# Altium PCB main.PcbDoc (part 7 of 8)
Units mil, origin at the board's own origin, x right, y up, seen from the top; angles counter-clockwise.
Board outline 3385.83 x 2362.2 mil, 8 copper layers (L1 (SIG), L2 (GND), L3 (SIG), L4 (GND), L5 (PWR), L6 (SIG), L7 (GND), L8 (SIG)), stack 46.958 mil thick; 318 components, 288 nets, 1482 pads, 1056 vias.
Unrouted connection lines stored in the file: 7.
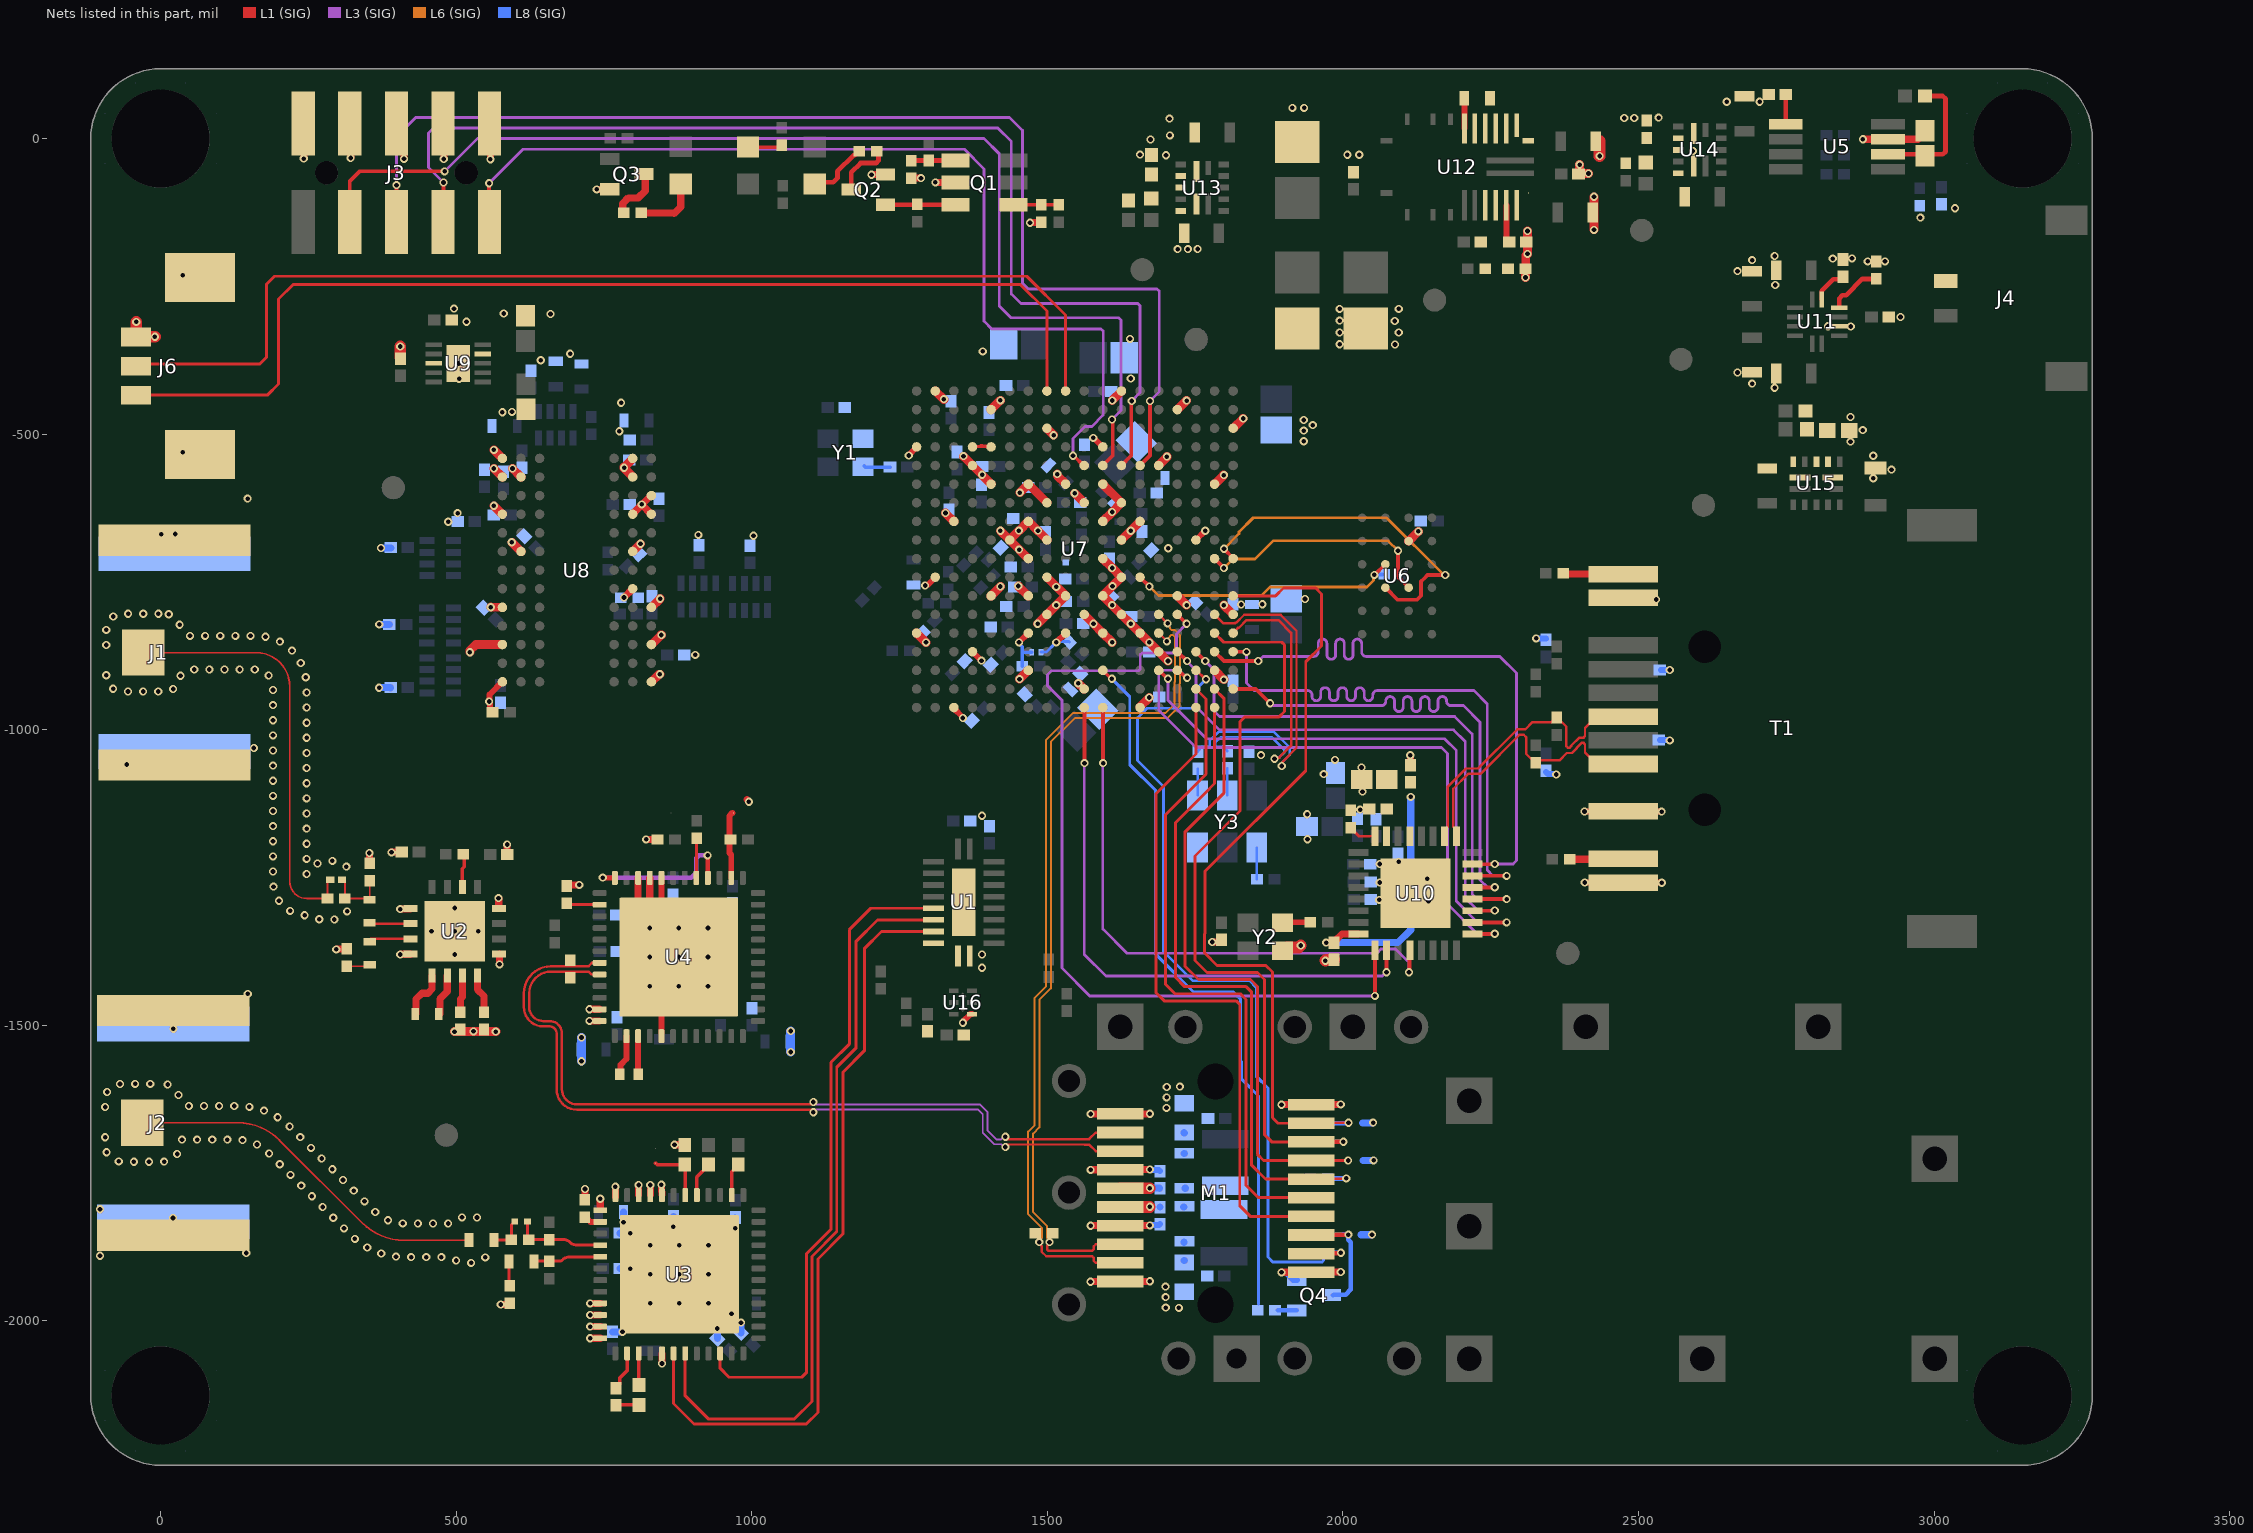
[diagram p11: the nets of this part, all layers, seen from the top]

## Via types
v1: diameter 13.78, hole 7.87, L1 (SIG) to L8 (SIG), tented both sides, 1033 vias
v2: diameter 13.78, hole 7.87, L1 (SIG) to L8 (SIG), 23 vias

## Nets (pads, with @x,y where several pads share a name; then routed paths per layer and width w, separated by ;. In a path a pad name is that pad's centre, name@x,y a point inside that pad or via, vN(x,y) a via of type N, cw(c..) or ccw(c..) an arc to the next point about the centre after c; other vN are vias at no path point) (continued)
ETH_RX_D3: U7.T15 U10.1 | length 1052.5
  L1 (SIG) w6.41: U7.T15@1719.82,-899.48 1721.87,-899.48 1734.37,-911.99 v1(1736.36,-911.99) ; U10.1@2219.37,-1345.5 2256.46,-1345.5 v1(2256.81,-1345.15)
  L3 (SIG) w4.7: v1(1736.36,-911.99) 1735.81,-911.99 1726.23,-902.4 1722.9,-902.4 1719.98,-899.48 1691.08,-899.48 1688.33,-902.24 1688.33,-966.66 1751.73,-1030.07 2166.73,-1030.07 2176.81,-1040.15 2176.81,-1062.95 2176.81,-1244.52 2176.81,-1294.77 2227.19,-1345.15 v1(2256.81,-1345.15)
ETH_RX_DV: U7.V10 U10.26 | length 984.4
  L1 (SIG) w6.41: U7.V10@1562.34,-962.48 1562.62,-962.75 1562.62,-1056.12 v1(1562.9,-1056.4) ; v1(2073.7,-1410.15) U10.26@2073.7,-1373.06
  L3 (SIG) w4.7: v1(1562.9,-1056.4) 1562.34,-1056.96 1562.34,-1380 1599.07,-1416.73 2066.41,-1416.73 2072.99,-1410.15 v1(2073.7,-1410.15)
ETH_RX_ER: U7.V11 U10.28 | length 976.5
  L1 (SIG) w6.41: U7.V11@1593.84,-962.48 1594.12,-962.75 1594.12,-1056.12 v1(1594.4,-1056.4) ; v1(2111.81,-1410.15) 2112.44,-1409.52 2112.44,-1373.69 U10.28@2113.07,-1373.06
  L3 (SIG) w4.7: v1(1594.4,-1056.4) 1593.84,-1056.96 1593.84,-1337.31 1634.55,-1378.02 2057.09,-1378.02 2064.1,-1371.01 2089.11,-1371.01 2111.81,-1393.71 v1(2111.81,-1410.15)
ETH_RXCLK: U7.N15 U10.25 | length 1457.3
  L1 (SIG) w6.41: U7.N15@1719.82,-805 v1(1735.57,-820.74) ; v1(2054.02,-1450.15) U10.25@2054.02,-1373.06
  L3 (SIG) w4.7: v1(1735.57,-820.74) 1718.52,-837.79 1718.52,-867.31 1715.76,-870.06 1660.07,-870.06 1657.31,-872.82 1657.31,-897.25 1654.56,-900.01 1506.78,-900.01 1500.24,-906.54 1500.24,-925.54 1524.77,-950.06 1524.77,-1032.91 1524.77,-1403.14 1571.78,-1450.15 v1(2054.02,-1450.15)
ETH_TX_D0: U7.R16 U10.4 | length 955.5
  L1 (SIG) w6.41: U7.R16@1751.32,-867.99 v1(1767.07,-883.74) ; U10.4@2219.37,-1286.45 v1(2276.81,-1286.45)
  L3 (SIG) w4.7: v1(1767.07,-883.74) 1781.81,-898.48 1781.81,-967.98 1791.17,-977.34 2189,-977.34 2218.61,-1006.95 2218.61,-1277.58 2227.48,-1286.45 v1(2276.81,-1286.45)
ETH_TX_D1: U7.U18 U10.5 | length 906.9
  L1 (SIG) w6.41: U7.U18@1814.31,-930.98 1852.64,-930.98 v1(1876.81,-955.15) ; U10.5@2219.37,-1266.76 2256.46,-1266.76 v1(2256.81,-1266.41)
  L3 (SIG) w4.7: v1(1876.81,-955.15) 1880.79,-959.12 2033.36,-959.12 2065.12,-959.12 ccw(c2065.12,-951.77) 2072.47,-951.77 2072.47,-951.22 cw(c2079.82,-951.22) 2087.17,-951.22 2087.17,-961.78 ccw(c2094.52,-961.78) 2101.88,-961.78 2101.88,-951.22 cw(c2109.23,-951.22) 2116.58,-951.22 2116.58,-961.78 ccw(c2123.93,-961.78) 2131.28,-961.78 2131.28,-951.22 cw(c2138.63,-951.22) 2145.98,-951.22 2145.98,-961.78 ccw(c2153.33,-961.78) 2160.68,-961.78 2160.68,-951.22 cw(c2168.03,-951.22) 2175.39,-951.22 2175.39,-951.77 ccw(c2182.74,-951.77) 2182.74,-959.12 2203.16,-959.12 2203.67,-959.12 2231.81,-987.27 2231.81,-1253.98 2244.24,-1266.41 v1(2256.81,-1266.41)
ETH_TX_D2: U7.R18 U10.6 | length 988.5
  L1 (SIG) w6.41: U7.R18@1814.31,-867.99 1814.44,-868.11 1836.68,-868.11 v1(1836.81,-868.24) ; U10.6@2219.37,-1247.08 v1(2276.81,-1247.08)
  L3 (SIG) w4.7: v1(1836.81,-868.24) 1836.81,-920.6 1850.03,-933.82 1927.14,-933.82 1940.3,-933.82 cw(c1940.3,-941.17) 1947.65,-941.17 1947.65,-943.57 ccw(c1955,-943.57) 1962.35,-943.57 1962.35,-936.17 cw(c1969.7,-936.17) 1977.05,-936.17 1977.05,-943.57 ccw(c1984.4,-943.57) 1991.76,-943.57 1991.76,-936.17 cw(c1999.11,-936.17) 2006.46,-936.17 2006.46,-943.57 ccw(c2013.81,-943.57) 2021.16,-943.57 2021.16,-936.17 cw(c2028.51,-936.17) 2035.86,-936.17 2035.86,-943.57 ccw(c2043.21,-943.57) 2050.56,-943.57 2050.56,-941.17 cw(c2057.91,-941.17) 2057.91,-933.82 2060.27,-933.82 2221.45,-933.82 2244.06,-956.43 2244.06,-1237.4 2253.74,-1247.08 v1(2276.81,-1247.08)
ETH_TX_D3: U7.R17 U10.7 | length 1083.6
  L1 (SIG) w6.41: U7.R17@1782.81,-867.99 1798.56,-883.74 v1(1856.81,-883.74) ; U10.7@2219.37,-1227.39 2256.46,-1227.39 v1(2256.81,-1227.04)
  L3 (SIG) w4.7: v1(1856.81,-883.74) 1864.68,-875.87 1948.47,-875.87 1950.82,-875.87 ccw(c1950.82,-868.52) 1958.17,-868.52 1958.17,-854.02 cw(c1965.52,-854.02) 1972.87,-854.02 1972.87,-873.52 ccw(c1980.22,-873.52) 1987.57,-873.52 1987.57,-854.02 cw(c1994.92,-854.02) 2002.28,-854.02 2002.28,-873.52 ccw(c2009.63,-873.52) 2016.98,-873.52 2016.98,-854.02 cw(c2024.33,-854.02) 2031.68,-854.02 2031.68,-868.52 ccw(c2039.03,-868.52) 2039.03,-875.87 2076.41,-875.87 2265.26,-875.87 2293.61,-904.22 2293.61,-1221.36 2287.89,-1227.08 2274.47,-1227.08 2274.43,-1227.04 v1(2256.81,-1227.04)
ETH_TX_EN: U7.R15 U10.3 | length 946.8
  L1 (SIG) w6.41: U7.R15@1719.82,-867.99 1720.22,-867.99 1735.97,-883.74 v1(1736.36,-883.74) ; U10.3@2219.37,-1306.13 2256.46,-1306.13 v1(2256.81,-1305.78)
  L3 (SIG) w4.7: v1(1736.36,-883.74) 1736.36,-884.53 1751.47,-899.63 1751.47,-960.45 1791.17,-1000.15 2186.81,-1000.15 2206.81,-1020.15 2206.81,-1284.48 2227.48,-1305.15 2256.18,-1305.15 v1(2256.81,-1305.78)
ETH_TXCLK: U7.T14 U10.2 | length 993.1
  L1 (SIG) w6.41: U7.T14@1688.33,-899.48 1689.16,-899.48 1703.36,-913.69 v1(1703.99,-913.69) ; U10.2@2219.37,-1325.82 v1(2276.81,-1325.82)
  L3 (SIG) w4.7: v1(1703.99,-913.69) 1704.07,-913.77 1704.07,-950.04 1769.18,-1015.15 2171.81,-1015.15 2191.81,-1035.15 2191.81,-1290.15 2227.48,-1325.82 v1(2276.81,-1325.82)
F_TCK: J3.9 U7.E10 | length 1672.7
  L1 (SIG) w6.41: v1(555.73,-75.53) 555.73,-140.83 J3.9@556.39,-141.49 ; v1(1543.5,-536.63) 1544.72,-536.63 1561.12,-553.03 U7.E10@1562.34,-553.03
  L3 (SIG) w4.7: v1@555.76,-76.63 v1(555.73,-75.53) 613.27,-17.99 1359.76,-17.99 1393,-51.24 1393,-308.87 1406.02,-321.89 1590.65,-321.89 1594.41,-325.64 1594.41,-459.01 1594.4,-467.81 1575.36,-486.85 1563.78,-486.85 1543.52,-507.12 v1(1543.5,-536.63)
F_TDI: J3.3 U7.E11 | length 1908.5
  L1 (SIG) w6.41: J3.3@320.17,-107.04 320.17,-71.5 336.23,-55.44 v1(480.48,-55.44) ; U7.E11@1593.84,-553.03 1610.46,-536.4 1610.46,-476.09 v1(1609.48,-475.11)
  L3 (SIG) w4.7: v1@478.37,-53.74 482.18,-53.74 535.99,0.07 1392.84,0.07 1418.58,-25.67 1418.58,-283.3 1438.43,-303.16 1620.66,-303.16 1624.42,-306.91 1624.42,-460.17 v1(1609.48,-475.11)
F_TDO: J3.5 U7.E13 | length 2029.1
  L1 (SIG) w6.41: J3.5@398.91,-141.49 399.12,-141.28 399.12,-80.49 v1@399.84,-79.77 ; U7.E13@1656.83,-553.03 1673.55,-536.31 1673.55,-443.95 v1(1673.69,-443.81)
  L3 (SIG) w4.7: v1(399.12,-78.68) 399.12,3.36 431.56,35.8 1436.01,35.8 1457.83,13.98 1457.83,-244.04 1468.33,-254.54 1685.65,-254.54 1689.41,-258.3 1689.41,-428.09 v1(1673.69,-443.81)
F_TMS: J3.7 U7.E12 | length 1931.3
  L1 (SIG) w6.41: J3.7@477.65,-141.49 478.65,-140.49 478.65,-73.72 v1@480.45,-71.92 ; U7.E12@1625.33,-553.03 1642.05,-536.31 1642.05,-444.49 v1(1642.72,-443.81)
  L3 (SIG) w4.7: 462.29,17.87 1416.09,17.87 1439.1,-5.14 1439.1,-262.77 1455.36,-279.03 1652.97,-279.03 1656.72,-282.79 1656.72,-429.81 v1(1642.72,-443.81) ; 462.29,18.6 452.99,9.29 452.99,-48.66 v1(478.65,-74.32)
GND: C1.2 C2.2 C3.2 C4.2 C6.2 C7.2 C8.1 C9.2 C10.1 C11.2 C12.2 C13.2 C14.2 C15.2 C16.1 C19.2 C20.1 C21.1 C22.1 C23.2 C24.1 C25.1 C26.2 C27.1 C29.1 C30.2 C31.2 C32.2 C33.1 C34.1 C35.1 C37.2 C39.2 C40.1 C41.2 C42.1 C43.1 C44.1 C45.1 C46.1 C47.1 C48.1 C49.1 C50.1 C51.2 C52.2 C53.2 C54.1 C55.1 C56.1 C59.2 C60.2 C61.2 C62.2 C63.2 C75.2 C78.2 C79.2 C80.2 C81.2 C82.2 C83.2 C84.2 C85.1 C86.1 C87.1 C88.1 C89.1 C90.1 C91.2 C92.2 C93.2 C94.2 C95.2 C96.2 C97.2 C98.2 C99.2 C101.1 C102.2 C103.2 C104.2 C105.2 C107.2 C108.2 C109.2 C110.2 C111.1 C112.1 C113.2 C114.1 C115.1 C116.1 C117.1 C118.1 C119.2 C120.1 C121.1 C122.1 C123.1 C124.1 C125.2 C126.2 C127.2 C128.2 C130.2 C131.2 C132.2 C133.2 C134.2 C135.2 C136.2 C137.2 C138.1 C146.2 C148.2 C149.2 C150.2 C151.1 C152.2 C154.1 C155.1 C157.1 C159.2 C160.2 C162.1 C163.2 C164.2 C165.1 C166.1 C167.1 C168.1 C171.1 C172.1 C173.2 C174.2 C175.2 C176.2 C178.2 C181.2 C182.2 C183.2 C184.2 C185.2 C186.2 C187.2 C188.2 C189.2 C190.2 C191.2 C192.2 C193.2 C194.2 FB2.1 J1.S1 J1.S2 J1.S3 J1.S4 J2.S1 J2.S2 J2.S3 J2.S4 J3.2 J3.4 J3.6 J3.8 J3.10 J4.2 J6.3 J6.MP1 J6.MP2 M1.1 M1.10 M1.11 M1.14 M1.17 M1.20 Q1.5 Q2.2 Q3.2 Q4.2 R3.2 R4.2 R7.2 R8.2 R11.2 R12.1 R18.1 R21.2 R31.2 R35.2 R37.1 R55.2 R57.2 R58.2 R61.2 R62.2 R63.2 R67.2 R72.1 R75.2 R89.2 R90.1 SB1.1 SB4.2 SB5.2 SB6.2 T1.8 T1.10 T1.12 U1.10 U1.11 U1.21 U2.1 U2.4 U2.9 U2.12 U2.17 U3.8 U3.9 U3.10 U3.12 U3.13 U3.21 U3.22 U3.23 U3.24 U3.29 U3.49@877.6,-1921.02 U4.8 U4.9 U4.10 U4.23 U4.24 U4.29 U4.49@876.68,-1384.44 U5.3 U6.B3 U7.A2 U7.A12 U7.B5 U7.B15 U7.C8 U7.C18 U7.D1 U7.D11 U7.E4 U7.E14 U7.F5 U7.F7 U7.F9 U7.F11 U7.F17 U7.G8 U7.G10 U7.G12 U7.H3 U7.H7 U7.H11 U7.H13 U7.J6 U7.J8 U7.J12 U7.J16 U7.K7 U7.K11 U7.L2 U7.L8 U7.L12 U7.M5 U7.M7 U7.M9 U7.M11 U7.M15 U7.N8 U7.N10 U7.N12 U7.N18 U7.P1 U7.P11 U7.P13 U7.R4 U7.R14 U7.T7 U7.T17 U7.U10 U7.V3 U7.V13 U8.A1 U8.A8 U8.B1 U8.B2 U8.B8 U8.C9 U8.D1 U8.D8 U8.D9 U8.F2 U8.F8 U8.J1 U8.J9 U8.L1 U8.L9 U8.N1 U8.N9 U9.4 U9.8 U9.11 U10.33 U11.2 U12.1 U12.2 U12.3 U12.4 U12.5 U12.18 U12.24 U13.2 U13.4 U13.7 U13.8 U14.2 U14.4 U14.7 U14.8 U15.2 U15.4 U15.7 U15.8 U16.1 Y1.2 Y2.2 Y3.3 | length 4812.2
  L1 (SIG) w10: v1(555.73,-952.14) 556.45,-951.41 556.45,-940.59 U8.N1@578.15,-918.9 ; v1@556.43,-952.14 557.16,-952.86 557.16,-968.69 R18.1@558.86,-970.39 ; U8.J1@577.6,-792.37 U8.J1@578.15,-792.91 ; U8.L1@577.79,-855.55 U8.L1@578.15,-855.9 ; U8.B8@798.62,-572.44 798.62,-571.91 U8.B8@798.62,-570.78 ; U8.D8@798.73,-635.38 U8.D8@798.73,-634.58 ; v1@813.84,-619.46 813.84,-619.15 v1(813.84,-618.72) v1@814.59,-618.72 ; U8.C9@829.37,-603.93 U8.C9@830.12,-603.93 ; U4.49@847.08,-1305.62 U4.8@847.08,-1250.66 ; U4.29@847.15,-1518.3 U4.49@847.15,-1465.7 ; v1(1265.46,-536.1) 1265.46,-535.52 1278.68,-522.3 U7.D1@1278.68,-521.97 ; v1(1293.3,-756.1) 1294.02,-755.37 1297.17,-755.37 1308.45,-744.09 1308.45,-743.93 U7.L2@1310.37,-742 ; v1(1327.66,-633.46) v1@1327.74,-633.46 ; U7.H3@1341.87,-647.52 U7.H3@1341.87,-647.52 ; U7.V3@1341.87,-962.48 1341.87,-963.82 1357.18,-979.13 v1(1357.18,-980.15) ; v1(1357.18,-1495.64) 1357.9,-1494.92 1357.9,-1493.3 1370.26,-1480.93 U16.1@1372.46,-1480.93 ; U7.R4@1373.39,-867.99 v1(1388.51,-883.09) ; U7.B5@1404.86,-458.54 U7.B5@1404.86,-458.01 ; U7.M7@1467.08,-773.5 1467.33,-773.5 U7.M7@1467.85,-773.5 ; U7.U10@1562.11,-930.98 U7.U10@1562.34,-930.98 ; v1(1577.53,-506.26) 1578.05,-506.26 1593.32,-521.53 U7.D11@1593.84,-521.53 ; U7.E14@1688.25,-553.03 U7.E14@1688.33,-553.03 ; U7.J16@1751.32,-679.01 v1(1767.07,-663.26) ; v1(2408.61,-1138.18) 2409.04,-1138.61 2473.63,-1138.61 T1.8@2474.02,-1138.22 ; v1@2409.42,-1258.69 T1.10@2474.02,-1258.69 ; T1.8@2473.61,-1138.43 2474,-1138.04 2538.59,-1138.04 v1(2539.02,-1138.47) ; T1.10@2474.2,-1258.26 v1@2538.8,-1258.26
  L1 (SIG) w12: J3.2@241.43,25.84 242.51,24.75 242.51,-33.31 242.17,-33.65 v1(242.17,-33.99) ; v1(297.16,-1371.45) 297.5,-1371.11 314.27,-1371.11 R58.2@314.8,-1370.58 ; v1@321.74,-32.08 J3.4@321.74,25.99 ; v1(353.2,-1208.45) 353.54,-1208.79 R57.2@353.54,-1225.56 ; v1@390.98,-1207.11 C52.2@407.75,-1207.11 ; J3.6@399.72,24.44 411.86,12.31 v1(411.86,-34.29) ; v1(405.3,-1380.13) 405.64,-1379.79 U2.4@422.41,-1379.79 ; v1(405.3,-1303.36) 405.64,-1303.02 U2.1@422.41,-1303.02 ; v1@479.26,-33.93 J3.8@479.26,24.13 ; v1@558.17,-34.24 J3.10@558.17,23.82 ; v1(571.68,-1284.84) 572.02,-1285.18 U2.12@572.02,-1301.95 ; U2.9@573.08,-1379.79 573.08,-1396.56 v1(573.42,-1396.9) ; v1(575.35,-1972.08) R67.2@590.26,-1972.08 ; C53.2@586.25,-1210.83 v1(586.25,-1194.06) ; R55.2@687,-1262.21 687.04,-1262.26 708.07,-1262.26 v1(708.12,-1262.31) ; R72.1@717.49,-1794.77 717.68,-1794.58 717.68,-1776.89 v1(717.86,-1776.7) ; v1(725.46,-1492.5) U4.24@742.59,-1492.5 ; v1(725.46,-1472.81) U4.23@742.59,-1472.82 ; v1(726.62,-2029.28) U3.24@743.74,-2029.28 ; v1@726.63,-2009.6 U3.23@743.74,-2009.6 ; v1(726.62,-1989.91) U3.22@743.74,-1989.91 ; v1(726.62,-1970.23) U3.21@743.74,-1970.23 ; v1(737.77,-85.96) 759.7,-85.96 Q3.2@759.92,-85.73 ; U3.13@743.72,-1811.67 v1(743.7,-1793.26) ; U3.12@769.34,-1790.19 U3.12@769.34,-1787.16 v1(769.34,-1773.07) ; U8.D8@798.73,-634.58 v1@813.84,-619.46 ; U4.10@807.78,-1250.58 807.78,-1290.05 813.36,-1295.62 U4.49@827.08,-1295.62 ; U3.10@808.71,-1787.16 v1(808.71,-1770.04) ; v1@813.84,-619.15 U8.D9@830.12,-635.43 ; v1@814.59,-618.72 U8.C9@829.37,-603.93 ; v1(821.25,-1185.41) R31.2@838.37,-1185.42 ; U4.49@827.47,-1295.23 U4.9@827.47,-1250.58 ; U3.9@828.39,-1787.16 v1(828.39,-1770.04) ; v1(847.08,-1769.64) 847.42,-1769.98 847.42,-1781.35 848.08,-1782.01 U3.8@848.08,-1787.16 ; U4.49@847.08,-1465.62 U4.49@847.15,-1465.7 ; v1@848.08,-2071.99 U3.29@848.08,-2054.88 ; v1(869.32,-1701.95) R63.2@886.44,-1701.95 ; v1@992.16,-1118.04 994.69,-1120.57 994.69,-1121.52 v1(995.03,-1121.86) ; v1(1202.61,-61.25) 1202.85,-61.01 1226.09,-61.01 Q2.2@1226.34,-60.76 ; R11.2@1269.36,-66.64 1269.46,-66.74 1286.09,-66.74 v1(1286.19,-66.83) ; v1(1310.52,-74.09) 1310.74,-74.3 1344.15,-74.3 Q1.5@1344.36,-74.51 ; v1(1470.57,-142.49) 1470.91,-142.15 1488.35,-142.15 R12.1@1488.6,-142.4 ; v1@1573.13,-1933.48 M1.20@1623.01,-1933.48 ; v1@1573.33,-1838.79 M1.17@1623.21,-1838.79 ; v1@1573.33,-1744.3 M1.14@1623.21,-1744.3 1623.41,-1744.1 1673.28,-1744.1 v1(1673.48,-1743.9) ; v1@1573.33,-1649.81 M1.11@1623.21,-1649.81 ; M1.20@1623.41,-1933.08 v1@1673.28,-1933.08 ; M1.17@1623.41,-1838.59 v1@1673.28,-1838.59 ; M1.11@1623.41,-1649.61 v1@1673.28,-1649.61 ; v1(1779,-1359.09) 1779.34,-1358.75 1790.87,-1358.75 1794.17,-1355.45 C40.1@1794.17,-1355.05 ; v1(1895.96,-1917.76) 1896.08,-1917.65 1945.92,-1917.65 M1.1@1946.04,-1917.53 ; v1@1896.16,-1634.06 M1.10@1946.04,-1634.06 ; M1.1@1946.24,-1917.33 v1@1996.12,-1917.33 ; M1.10@1946.24,-1633.86 v1@1996.12,-1633.86 ; v1(2113.83,-1043.11) 2114.09,-1043.38 2114.09,-1060.2 C33.1@2113.99,-1060.3 ; v1(2879.41,-1.1) U5.3@2922.16,-1.1 2972.37,-1.1 2984.41,10.95 C133.2@2984.41,13.29
  L1 (SIG) w15: v1(497.08,-1510.62) 510.54,-1510.62 512.08,-1509.09 513.61,-1510.62 v1(567.08,-1510.62) ; v1(523.15,-868.82) 523.15,-865.97 533.22,-855.9 577.74,-855.9 U8.L1@577.79,-855.95 ; v1(558.6,-792.66) 577.62,-792.69 U8.J1@577.93,-793 ; v1@563.79,-621.02 U8.D1@578.1,-635.33 ; v1@563.79,-558.03 U8.B1@578.1,-572.33 ; v1@563.79,-526.53 U8.A1@578.1,-540.84 ; v1(594.14,-682.87) U8.F2@609.59,-698.32 ; v1@595.29,-558.03 U8.B2@609.59,-572.33 ; U8.F8@798.62,-698.42 U8.F8@798.62,-698.42 v1(811.81,-685.29) ; U8.B8@798.62,-571.91 798.4,-571.91 784.04,-557.55 v1(784.04,-556.84) 784.04,-555.83 798.4,-541.47 U8.A8@798.73,-541.47 ; U8.N9@830.22,-918.85 830.48,-918.85 843.22,-906.1 v1(844.53,-906.1) ; U8.L9@830.22,-855.8 830.53,-855.8 846.62,-839.7 v1(847.03,-839.7) ; U8.J9@830.22,-792.86 830.46,-792.86 v1(845.05,-778.28) ; U7.P1@1278.88,-836.49 v1(1294.63,-852.24) ; U7.A2@1310.37,-427.04 1310.68,-427.04 v1@1324.89,-441.25 ; v1@1327.74,-633.46 U7.H3@1341.87,-647.52 ; v1@1358.14,-537.65 U7.E4@1373.37,-552.87 ; U7.E4@1373.37,-553.03 U7.F5@1404.86,-584.52 ; U7.M5@1404.86,-773.5 v1(1420.61,-757.75) ; U7.B5@1404.86,-458.01 1404.95,-458.1 1405.17,-458.1 v1(1420.47,-442.79) ; v1(1420.61,-663.26) U7.J6@1436.36,-679.01 ; v1(1450.82,-756.93) 1450.98,-756.93 1467.33,-773.28 U7.M7@1467.33,-773.5 ; v1(1452.77,-914.34) 1467.62,-899.48 U7.T7@1467.85,-899.48 ; v1(1453.44,-598.85) 1467.76,-584.52 U7.F7@1467.85,-584.52 ; U7.K7@1467.85,-710.51 U7.J6@1436.36,-679.01 ; U7.F7@1468.48,-585.15 U7.G8@1499.35,-616.02 ; v1(1483.6,-820.74) v1(1515.1,-789.25) U7.M9@1530.85,-773.5 U7.L8@1499.35,-742 ; v1@1484.12,-663.63 U7.J8@1499.35,-678.86 ; v1(1484.12,-663.18) 1483.82,-663.18 1468.16,-647.52 U7.H7@1467.85,-647.52 1452.15,-663.22 v1(1451.91,-663.22) 1436.36,-678.77 U7.J6@1436.36,-679.01 ; U7.C8@1499.2,-490.03 1499.2,-490.19 1510.62,-501.61 v1(1510.62,-501.75) ; v1(1516.67,-567.67) 1516.67,-570.04 1530.85,-584.21 U7.F9@1530.85,-584.52 ; v1(1546.05,-599.86) 1546.19,-599.86 U7.G10@1562.34,-616.02 ; v1(1552.22,-921.37) 1552.43,-921.37 1562.03,-930.98 U7.U10@1562.11,-930.98 ; U7.N10@1562.34,-805 v1(1578.09,-820.74) U7.P11@1593.84,-836.49 v1(1609.59,-852.24) ; U7.K11@1593.84,-710.51 v1(1609.59,-726.26) U7.L12@1625.33,-742 U7.M11@1593.84,-773.5 U7.N12@1625.33,-805 v1(1641.08,-820.74) U7.R14@1688.33,-867.99 1703.99,-883.65 v1(1703.99,-883.74) ; U7.H11@1593.84,-647.52 v1(1609.59,-631.77) U7.G12@1625.33,-616.02 ; U7.F11@1593.84,-584.52 1623.72,-614.41 U7.G12@1623.72,-616.46 ; v1(1609.75,-443.04) 1609.75,-442.93 1625.49,-427.2 U7.A12@1625.49,-427.04 ; U7.J12@1625.33,-679.01 v1(1641.08,-663.26) U7.H13@1656.83,-647.52 ; U7.V13@1656.68,-961.31 v1(1672.43,-945.56) ; U7.E14@1688.25,-553.03 1688.25,-552.79 1702.16,-538.88 v1(1702.16,-537.98) ; U7.M15@1719.82,-773.5 v1(1735.57,-789.25) ; U7.B15@1719.98,-458.54 v1@1735.2,-443.31 ; U7.T17@1782.81,-899.48 v1(1798.56,-915.23) ; U7.F17@1782.97,-584.52 v1@1798.19,-569.3 ; v1(1798.56,-789.25) U7.N18@1814.31,-805 ; U7.C18@1814.46,-490.03 1814.62,-490.03 1831.14,-473.51 v1(1831.28,-473.51) ; U6.B3@2111.18,-680.78 2111.18,-680.94 v1@2127.5,-664.62 ; R7.2@2308.67,-220.89 2308.82,-221.05 v1(2308.82,-234.99) ; R7.2@2309.28,-220.52 2309.28,-197.81 v1(2312.1,-194.99) v1(2312.1,-156.41) ; v1(2400.39,-44.02) 2400.39,-58.98 v1(2415.34,-58.98) ; v1@2424.56,-153.58 C12.2@2424.56,-125.78 ; C12.2@2424.56,-123.98 v1(2424.56,-98.51)
  L1 (SIG) w20: v1(-41.18,-310.09) -41.18,-334.55 -41.57,-334.94 -41.4,-335.12 v1(-9.6,-335.12) ; C128.2@405.49,-370.24 v1@405.49,-351.9 ; Y2.2@1904.31,-1369.45 1905.57,-1368.19 1925.25,-1368.19 v1(1928.53,-1364.91) ; v1@1970.73,-1390.09 1971.33,-1389.49 1984.61,-1389.49 C34.1@1985.23,-1388.87 ; v1@2434.2,-29.83 C11.2@2434.2,-4.1
  L8 (SIG) w10: v1@1674.63,-1838.53 1674.63,-1838.26 1675.23,-1837.66 1688.8,-1837.66 C154.1@1690.26,-1836.2 ; v1@1674.63,-1744.1 1675.15,-1744.62 1688.43,-1744.62 C155.1@1690.46,-1746.64 ; v1(1895.96,-1917.76) 1896.69,-1918.49 1903.61,-1918.49 1915.97,-1930.85 Q4.2@1922.07,-1930.85 ; v1@1995.92,-1917.75 v1@1995.92,-1916.6 ; v1(2326.81,-845.34) 2327.17,-845.7 2343.43,-845.7 C50.1@2343.79,-846.06 ; C56.1@2343.79,-1071.66 2347.2,-1075.07 2360.16,-1075.07 v1(2360.89,-1075.8) ; C49.1@2535.81,-1017.53 v1@2552.51,-1017.53 ; C55.1@2537.51,-898.84 v1(2552.91,-898.84)
  L8 (SIG) w12: v1(369.63,-928.94) 369.84,-928.73 388.38,-928.73 C172.1@388.59,-928.94 ; v1@369.9,-821.8 C171.1@387.03,-821.8 ; v1(372.85,-692.55) C165.1@389.98,-692.56 ; C62.2@764.31,-2018.46 v1(781.43,-2018.46) ; C61.2@777.18,-1911.54 v1(794.3,-1911.55) ; C59.2@777.16,-1851.66 v1@794.28,-1851.66 ; v1(783.03,-1832.98) C101.1@783.03,-1815.86 ; v1(867.49,-1840.42) C60.2@867.49,-1823.3 ; C63.2@941.87,-2029.98 v1@941.87,-2012.86 ; v1(965.7,-1987.98) C148.2@965.71,-1970.86 ; v1(971.86,-1842.98) C110.2@971.87,-1825.86 ; C102.2@981.87,-2019.98 v1@981.87,-2002.86 ; 2030.96,-1854.14 2048.91,-1854.14 v1(2049.04,-1854.01) ; SB5.2@2033.35,-1664.93 v1@2050.67,-1664.93 ; 2034,-1728.5 2051.68,-1728.5 v1(2051.86,-1728.32)
  L8 (SIG) w15: v1(712.08,-1560.62) v1(712.08,-1520.62) ; v1(1065.85,-1545.2) 1065.36,-1544.7 1065.36,-1510.04 v1(1065.85,-1509.55)
  other v1: 848.07,-2072 941.88,-2012.85 726.62,-2009.6 981.88,-2002.85 1722.47,-1977.91 1700.36,-1977.39 1700.1,-1959.7 1699.84,-1942.01 1572.93,-1933.68 1673.48,-1932.88 1996.32,-1917.13 525.23,-1901.75 499.97,-1897.65 423.83,-1892.01 449.42,-1892.01 475.01,-1892.01 549.09,-1892.51 398.25,-1891.15 -102.36,-1889.76 373.21,-1885.9 145.02,-1885.09 349.7,-1875.78 328.67,-1861.2 794.28,-1851.66 310.23,-1843.46 1573.13,-1838.99 1673.48,-1838.39 409.62,-1834.89 435.2,-1835.15 460.79,-1835.15 486.39,-1835.15 384.56,-1829.66 20.95,-1825.89 292.13,-1825.36 509.77,-1824.75 535.36,-1825.02 363.16,-1815.63 -102.36,-1811.02 274.03,-1807.27 344.89,-1797.72 255.94,-1789.17 326.79,-1779.62 237.84,-1771.08 308.7,-1761.53 219.75,-1752.98 1573.13,-1744.5 290.6,-1743.43 201.65,-1734.89 -45.25,-1730.6 -19.66,-1730.6 -70.84,-1730.1 5.93,-1730.47 272.51,-1725.34 27.98,-1717.49 183.56,-1716.79 -91.29,-1714.73 254.41,-1707.24 163.01,-1701.54 138.53,-1694.08 36.18,-1693.25 61.77,-1693.25 87.36,-1693.25 112.95,-1693.25 -93.86,-1689.27 236.32,-1689.15 218.28,-1670.99 2050.99,-1664.61 197.94,-1655.46 1573.13,-1650.01 1673.48,-1649.41 174.93,-1644.26 1701.45,-1639.54 -93.86,-1638.09 150.16,-1637.84 47.84,-1636.39 73.43,-1636.39 99.02,-1636.39 124.61,-1636.39 1895.96,-1634.26 1996.32,-1633.66 1701.71,-1621.85 30.38,-1617.69 -90.39,-1612.73 1701.97,-1604.16 1724.08,-1603.64 11.93,-1599.95 -68.64,-1599.25 -43.05,-1599.04 -17.46,-1599.04 529.27,-1510.11 21.69,-1505.68 147.56,-1446.78 1389.55,-1402.5 1970.28,-1390.76 1389.55,-1380.26 268.36,-1320.55 293.95,-1320.85 243.69,-1313.74 315.56,-1307.15 219.18,-1306.39 2144.68,-1289.8 200.26,-1289.15 2061.47,-1287.74 190.9,-1265.33 2539.23,-1258.69 2062.37,-1258.45 2408.99,-1258.26 2142.52,-1252.11 247.01,-1243.93 190.15,-1239.75 314.29,-1231.47 2062.37,-1227.05 265.42,-1226.16 2094.22,-1223.44 290.62,-1221.72 247.01,-1218.34 190.15,-1214.16 390.64,-1207.45 247.01,-1192.75 190.15,-1188.57 1940.16,-1185.16 247.01,-1167.16 190.15,-1162.98 1389.55,-1145.36 1939.39,-1142.89 247.01,-1141.57 190.15,-1137.39 2029.06,-1135.1 247.01,-1115.98 190.15,-1111.8 2032.98,-1104.7 247.01,-1090.39 190.15,-1086.21 1967.53,-1075.04 247.01,-1064.8 2031.51,-1063.76 190.15,-1060.62 -57.21,-1058.89 1986.65,-1051.01 1861.36,-1042.97 247.01,-1039.21 190.15,-1035.03 157.76,-1030.97 2552.91,-1017.94 247.01,-1013.62 190.15,-1009.44 247.01,-988.03 190.15,-983.85 247.01,-962.44 190.15,-958.26 247.01,-936.85 -55.09,-935.38 -29.5,-935.38 -3.91,-935.38 190.15,-932.67 -80.22,-930.55 21.3,-930.98 245.51,-911.3 33.64,-908.56 -92.01,-907.84 182.83,-908.15 56.96,-898.03 82.55,-898.03 108.14,-898.03 133.74,-898.03 159.33,-898.03 237.05,-887.15 904.32,-873.37 222.32,-866.22 -92.01,-856.66 1672.58,-852.24 201.8,-850.94 177.6,-842.62 49.69,-841.17 75.28,-841.17 100.87,-841.17 126.46,-841.17 152.05,-841.17 -92.01,-831.07 32.22,-822.47 369.9,-821.8 -80,-808.47 13.77,-804.73 -54.84,-803.82 -29.24,-803.82 -3.65,-803.82 1609.59,-789.25 1827.78,-788.02 1863.66,-787.77 2529.68,-779.62 1935.7,-778.72 1514.98,-758.35 1610.26,-757.08 1452.18,-695.36 1704.41,-692.99 1003.05,-671.88 909.64,-670.42 0.86,-669.38 24.66,-668.84 2127.5,-664.48 486.73,-648.23 502.5,-633.58 563.74,-621.02 147.23,-608.96 2897.13,-574.63 1389.64,-568.69 1798.65,-569.3 2927.77,-560.02 563.74,-558.03 595.24,-558.03 1358.14,-537.19 2897.13,-536.62 37.61,-530.62 563.74,-526.53 2858.59,-512.66 1933.78,-511.9 776.11,-494.96 1933.78,-494.01 2879.16,-493.21 1948.85,-484.65 1933.78,-476.13 2858.59,-470.96 578.15,-463.03 594.42,-462.24 778.97,-446.88 1735.66,-443.31 1324.89,-440.81 2730.23,-421.49 2692.05,-414.46 504.95,-406.32 1641.15,-405.87 2667.38,-395.73 504.4,-380.5 643.04,-375.09 692.78,-364.04 1390.81,-359.95 405.3,-351.71 1994.41,-347.99 2088.16,-348.31 1639.92,-338.89 1994.41,-327.99 2094.41,-327.99 2859.06,-317.9 2820.4,-317.52 517.48,-309.79 1994.41,-307.99 2087.71,-308.47 2943.05,-301.68 659.52,-296.65 580.51,-295.82 496.35,-287.59 1994.41,-287.99 2094.41,-287.99 2731.31,-247.68 37.61,-231.4 2667.38,-224.27 2887.81,-207.7 2916.81,-207.7 2692.05,-205.54 2828.56,-203.01 2860.98,-202.65 2730.23,-198.51 1720.41,-186.93 1737.67,-186.93 1754.15,-186.68 2424.56,-154.37 2976.64,-133.67 3035.21,-117.9 478.92,-34.6 557.84,-34.91 321.4,-32.75 2434.22,-29.54 1700.79,-28.24 1656.71,-27.2 2007.55,-27.44 2027.55,-27.44 2591.92,-21.05 1674.41,-1.54 1707.24,5.42 1706.52,33.72 2475.82,34.79 2492.74,34.85 2533.93,35.45 1914.41,52.01 1934.41,52.01 2649.2,62.4 2704.8,62.4
  other v2: 828.39,-1970.23 877.6,-1970.23 926.82,-1970.23 828.39,-1921.02 877.6,-1921.02 926.82,-1921.02 828.39,-1871.8 877.6,-1871.8 926.82,-1871.8 827.47,-1433.65 876.68,-1433.65 925.89,-1433.65 827.47,-1384.44 876.68,-1384.44 925.89,-1384.44 497.75,-1380.24 458.38,-1340.87 497.75,-1340.87 537.12,-1340.87 827.47,-1335.23 876.68,-1335.23 925.89,-1335.23 497.75,-1301.5
INIT: D1.2 R16.1 U7.P7 | length 79.8
  L1 (SIG) w10: v1(1452.11,-852.24) U7.P7@1467.85,-836.49
  L8 (SIG) w6: v1@1453.45,-852.47 1453.45,-855.69 1457.58,-859.82 R16.1@1457.58,-892.89 ; 1458.41,-867.84 1459.19,-868.63 D1.2@1473.5,-868.63
LOOPTHRU_EN: R30.2 SB1.2 U4.2 | length 113.4
  L1 (SIG) w10: U4.2@965.26,-1250.58 965.26,-1211.28 962.08,-1208.1 962.08,-1185.62 962.08,-1145.78 967.23,-1140.62
NetC5_2: C5.2 R1.2 R3.1 U13.5
NetC9_1: C9.1 U11.5 | length 60.3
  L1 (SIG) w7.87: U11.5@2809.84,-272.24 2809.84,-257.31 2829.15,-238 2843.4,-238 C9.1@2846.11,-235.28
NetC17_2: C17.2 R5.2 R8.1 U14.5
NetC18_1: C18.1 R6.2 R7.1 U12.17
NetC19_1: C19.1 U12.6 | length 53
  L1 (SIG) w10: U12.6@2205.48,16.99 C19.1@2205.48,70.01
NetC20_2: C20.2 U12.19 | length 63.3
  L1 (SIG) w10: U12.19@2276.34,-112.94 2276.34,-172.03 C20.2@2279.3,-174.99
NetC28_1: C28.1 Y1.3 | length 44.4
  L8 (SIG) w6.41: Y1.3@1190.15,-553.9 1192.04,-555.79 C28.1@1233.82,-555.79
NetC33_2: C33.2 C34.2 C35.2 C41.1 U10.13 U10.15 U10.24 | length 437.2
  L1 (SIG) w12: v1(1971.62,-1360.01) C34.2@1985.23,-1360.01 ; C34.2@1985.23,-1358.69 1998.18,-1345.74 2007.89,-1345.74 2008.04,-1345.6 2026.36,-1345.6 U10.24@2026.46,-1345.5
  L8 (SIG) w12: v1(1971.62,-1360.01) 2093.2,-1360.01 2114.72,-1338.49 v1(2114.72,-1113.57)
NetC36_1: C36.1 Y3.4 | length 45.1
  L8 (SIG) w4.11: Y3.4@1754.11,-1110.93 1754.51,-1110.53 C36.1@1754.51,-1065.95
NetC38_1: C38.1 Y3.5 | length 46
  L8 (SIG) w4.11: Y3.5@1804.11,-1110.93 1804.11,-1065.71 C38.1@1804.64,-1065.19
NetC57_1: C57.1 U4.27 | length 66.6
  L1 (SIG) w10: C57.1@807.78,-1584.91 U4.27@807.78,-1518.3
NetC57_2: C57.2 U4.26 | length 68.6
  L1 (SIG) w10: C57.2@776.28,-1582.03 778.18,-1580.13 778.18,-1566.58 788.1,-1556.66 U4.26@788.1,-1518.3
NetC76_1: C76.1 L2.2 R66.2 | length 61.1
  L1 (SIG) w5: C76.1@563.88,-1862.97 R66.2@591.74,-1862.97 ; R66.2@593.4,-1862.28 593.4,-1836.67 598.12,-1831.95 L2.2@599.1,-1831.95
NetC76_2: C76.2 J2.1 | length 625.1
  L1 (SIG) w3: J2.1@-31.03,-1664.82 130.36,-1664.82 cw(c130.36,-1764.82) 201.07,-1694.11 341.26,-1834.29 ccw(c411.97,-1763.58) 411.97,-1863.58 C76.2@520.36,-1863.58
NetC77_1: C77.1 R67.1 | length 39.7
  L1 (SIG) w5: C77.1@589.15,-1899.24 589.15,-1935.93 ccw(c592.94,-1935.93) R67.1@590.26,-1938.62
NetC100_1: C100.1 R73.2 | length 29
  L1 (SIG) w6: 780.08,-2142.01 808.94,-2142.01 R73.2@809.06,-2141.89
NetC100_2: C100.2 U3.26 | length 66.4
  L1 (SIG) w6: C100.2@770.38,-2113.51 776.68,-2107.21 776.68,-2096.54 789.02,-2084.2 U3.26@789.02,-2054.88
NetC129_1: C129.1 L1.2 R56.2 R57.1 | length 106.6
  L1 (SIG) w3: L1.2@306.93,-1253.7 cw(c306.93,-1258.58) 311.81,-1258.58 R56.2@311.81,-1285.43 353.72,-1285.43 353.72,-1285.32 353.72,-1255.62 R57.1@354.07,-1255.62
NetC133_1: C133.1 R69.2 U5.2 | length 225.3
  L1 (SIG) w8: U5.2@2922.16,-26.69 3014.72,-26.69 3019.41,-22 3019.41,67.01 3014.41,72.01 R69.2@2984.41,72.01
NetC139_1: C139.1 R58.1 | length 39.2
  L1 (SIG) w3: R58.1@314.8,-1400.11 353.74,-1400.11 C139.1@353.74,-1399.81
NetC141_1: C141.1 U2.5 | length 82.1
  L1 (SIG) w12: C141.1@432.08,-1480.62 432.08,-1455.62 442.08,-1445.62 452.08,-1445.62 459.27,-1438.43 459.27,-1415.77 U2.5@459.36,-1415.67
NetC141_2: C141.2 U2.6 | length 70.3
  L1 (SIG) w12: C141.2@472.08,-1480.62 472.34,-1480.36 472.34,-1455.36 484.95,-1442.74 U2.6@484.95,-1415.67
NetC146_1: C146.1 U5.5 | length 51
  L1 (SIG) w8: U5.5@2748.94,24.49 2748.98,24.54 C146.1@2748.98,75.46
NetC153_1: C153.1 C154.2 L4.1 M1.16 | length 51
  L1 (SIG) w20: M1.16@1623.41,-1807.09 v1@1673.28,-1807.09
  L8 (SIG) w12: v1(1673.48,-1806.89) v1@1673.61,-1806.77 ; C154.2@1690.26,-1807.34 C154.2@1690.42,-1807.5 ; C153.1@1730.32,-1807.5 C153.1@1730.79,-1807.03
NetC153_2: C153.2 R89.1 | length 0.5
  L8 (SIG) w12: C153.2@1731.29,-1866.72 C153.2@1731.48,-1866.91 ; R89.1@1731.48,-1897.78 R89.1@1731.66,-1897.97
NetC155_2: C155.2 C156.1 L3.1 M1.15 | length 66.5
  L1 (SIG) w20: M1.15@1623.41,-1775.6 v1@1673.28,-1775.6
  L8 (SIG) w12: v1(1673.48,-1775.39) 1673.54,-1775.45 1689.81,-1775.45 C155.2@1689.89,-1775.53 ; C156.1@1733.19,-1775.53 C156.1@1733.32,-1775.4
NetC156_2: C156.2 R90.2 | length 0.7
  L8 (SIG) w12: R90.2@1731.07,-1681.57 R90.2@1731.52,-1682.02 ; C156.2@1731.52,-1716.44 C156.2@1731.58,-1716.5
NetC161_2: C161.2 R74.2 R75.1 U15.5
NetJ1_1: J1.1 L1.1 R56.1 | length 724.7
  L1 (SIG) w3: J1.1@-29.19,-869.6 162.07,-869.6 cw(c162.07,-925.29) 201.44,-885.91 cw(c160.07,-927.28) 218.58,-927.28 218.58,-1256.82 ccw(c247.16,-1256.82) 247.16,-1285.4 ; 247.31,-1285.43 R56.1@282.28,-1285.43 282.28,-1258.32 cw(c286.91,-1258.32) L1.1@286.91,-1253.7
NetJ6_1: J6.1 U7.A8 | length 1856.4
  L1 (SIG) w5: J6.1@-41.57,-434.07 180.49,-434.07 199.64,-414.93 199.64,-271.22 223.79,-247.07 1454.72,-247.07 1499.35,-291.7 U7.A8@1499.35,-427.04
NetJ6_2: J6.2 U7.A9 | length 1861.8
  L1 (SIG) w5: J6.2@-41.57,-381.01 168.25,-381.01 178.83,-370.44 178.83,-246.93 192.85,-232.91 1465.28,-232.91 1530.85,-298.47 U7.A9@1530.85,-427.04
NetLED1_2: LED1.2 R13.1 | length 55.2
  L1 (SIG) w6: LED1.2@993.89,-14.15 994.79,-15.06 R13.1@1048.74,-15.06
NetLED2_1: LED2.1 R77.1 | length 95.6
  L1 (SIG) w8: LED2.1@1117.79,-80.5 1117.79,-77.27 1121.17,-73.9 1137.87,-73.9 1145,-66.76 1145,-55.19 1172.2,-27.99 1174.16,-27.99 1179.02,-23.13 R77.1@1179.02,-21.16
NetLED3_1: LED3.1 R79.2 | length 107.6
  L1 (SIG) w12: R79.2@815.76,-125.84 868.47,-125.84 ; 868.47,-127.04 879.87,-115.63 LED3.1@879.87,-76.86
NetQ1_1: Q1.1 R10.2 R12.2 | length 76.7
  L1 (SIG) w6: Q1.1@1442.79,-111.92 1519.16,-111.92 R10.2@1519.36,-112.11
NetQ1_4: Q1.4 R9.2 R11.1 | length 75
  L1 (SIG) w8: R11.1@1269.36,-37.11 Q1.4@1344.36,-37.11
NetQ2_3: Q2.3 R77.2 | length 98.4
  L1 (SIG) w8: Q2.3@1168.46,-86.35 1168.46,-57.03 1184.09,-41.41 1210.24,-41.41 1214.2,-37.45 1214.2,-24.5 R77.2@1215.78,-22.92
NetQ3_3: Q3.3 R79.1 | length 90
  L1 (SIG) w12: R79.1@780.32,-125.84 781.7,-124.46 781.7,-109.72 791.22,-100.21 807.96,-100.21 819.76,-88.41 Q3.3@819.76,-61.97
NetQ4_1: Q4.1 R103.2 | length 32
  L8 (SIG) w8: R103.2@1890.21,-1981.79 1890.4,-1981.97 1922.02,-1981.97 Q4.1@1922.07,-1982.03
NetR4_1: R4.1 U11.4 | length 92
  L1 (SIG) w8: U11.4@2839.37,-286.02 2839.37,-270.58 2844.94,-265 2851.02,-265 2878.68,-237.34 R4.1@2902.12,-237.34
NetR21_1: R21.1 U8.H8 | length 21
  L1 (SIG) w12: v1(783.81,-776.25) U8.H8@798.62,-761.42
NetR25_1: R25.1 Y2.3 | length 45.3
  L1 (SIG) w10: Y2.3@1899.27,-1325.53 R25.1@1944.59,-1325.53
NetR32_2: R32.2 T1.9 | length 87
  L1 (SIG) w12: R32.2@2388.88,-1219.06 T1.9@2475.92,-1219.06
NetR36_2: R36.2 Y3.1 | length 53.9
  L8 (SIG) w4.11: Y3.1@1854.11,-1199.51 1854.11,-1252.63 R36.2@1854.64,-1253.15
NetR37_2: R37.2 U10.16 | length 49
  L1 (SIG) w5: R37.2@2010.49,-1167.04 2014.05,-1167.04 2027.15,-1180.15 U10.16@2054.02,-1180.15
NetR53_2: R53.2 T1.11 | length 91.7
  L1 (SIG) w12: R53.2@2382.34,-736.65 T1.11@2474.02,-736.65
NetR54_2: R54.2 U4.5 | length 64.1
  L1 (SIG) w5: U4.5@906.21,-1250.58 R54.2@906.21,-1186.49
NetR55_1: R55.1 U4.14 | length 55.8
  L1 (SIG) w5: R55.1@687.08,-1295.62 687.31,-1295.86 U4.14@742.82,-1295.86
NetR60_2: R60.2 U2.14 | length 56.8
  L1 (SIG) w6: U2.14@510.54,-1266.07 510.54,-1235.18 513.81,-1231.91 R60.2@513.81,-1210.62
NetR61_1: R61.1 U2.8 | length 64.5
  L1 (SIG) w12: U2.8@536.13,-1415.67 536.13,-1439.68 547.08,-1450.62 R61.1@547.08,-1475.62
NetR62_1: R62.1 U2.7 | length 61.4
  L1 (SIG) w12: R62.1@507.08,-1475.62 507.08,-1455.62 510.54,-1452.15 U2.7@510.54,-1415.67
NetR70_2: R70.2 U3.2 | length 56
  L1 (SIG) w6: U3.2@966.19,-1787.16 966.19,-1747.5 977.08,-1736.61 R70.2@977.08,-1735.62
NetR71_2: R71.2 U3.5 | length 59.8
  L1 (SIG) w6: U3.5@907.13,-1787.16 907.13,-1756.55 927.08,-1736.61 R71.2@927.08,-1735.62
NetR72_2: R72.2 U3.14 | length 30.2
  L1 (SIG) w10: R72.2@717.49,-1824.29 717.49,-1825.28 721.35,-1829.14 723.99,-1829.14 727.2,-1832.36 743.67,-1832.36 U3.14@743.74,-1832.43
NetR73_1: R73.1 U3.27 | length 53.2
  L1 (SIG) w6: R73.1@808.71,-2108.07 U3.27@808.71,-2054.88
NetU1_9: U1.9
NetU7_D4: U7.D4 U7.D5 | length 33.8
  L1 (SIG) w6.41: U7.D4@1371.6,-521.14 1371.6,-521.53 1373.84,-521.53 ccw(c1373.81,-515.12) 1374.45,-521.5 1386.72,-520.27 cw(c1388.08,-533.79) 1389.26,-520.25 U7.D5@1404.86,-521.53
OPTIC_TD_N: M1.12 R81.2 U4.20 | length 1355.4
  L1 (SIG) w4.11: U4.20@742.82,-1413.97 728.96,-1413.97 724.07,-1409.06 660.33,-1409.06 ccw(c660.33,-1445.84) 623.54,-1445.84 623.54,-1468.9 ccw(c647.37,-1468.9) 647.37,-1492.73 657.97,-1492.73 cw(c657.97,-1513.68) 678.93,-1513.68 678.93,-1608.11 ccw(c704.52,-1608.11) 704.52,-1633.7 1100.21,-1633.7 ccw(c1100.21,-1629.62) v1(1104.29,-1629.62) ; v1(1428.95,-1688.36) 1433.04,-1692.44 1563.27,-1692.44 ; 1563.27,-1692.5 1570.59,-1692.5 1581.78,-1681.31 M1.12@1623.21,-1681.31
  L3 (SIG) w3.3: v1(1104.29,-1629.62) ccw(c1108.51,-1629.62) 1108.51,-1633.83 1385.97,-1633.83 1399.05,-1646.91 1399.05,-1678.32 1413.58,-1692.85 1421.78,-1692.85 1426.27,-1688.36 v1(1428.95,-1688.36)
OPTIC_TD_P: M1.13 R81.1 U4.19 | length 1384.3
  L1 (SIG) w4.11: 728.96,-1395.06 724.07,-1399.95 660.33,-1399.95 ccw(c660.33,-1445.84) 614.44,-1445.84 614.44,-1468.9 ccw(c647.37,-1468.9) 647.37,-1501.83 657.97,-1501.83 cw(c657.97,-1513.68) 669.82,-1513.68 669.82,-1608.11 ccw(c704.52,-1608.11) 704.52,-1642.81 1100.21,-1642.81 cw(c1100.21,-1646.89) v1(1104.29,-1646.89) ; 728.96,-1394.28 U4.19@742.82,-1394.28 ; v1(1428.95,-1705.64) 1433.04,-1701.55 1563.27,-1701.55 ; 1563.27,-1701.61 1570.59,-1701.61 1581.78,-1712.8 M1.13@1623.21,-1712.8
  L3 (SIG) w3.3: v1(1104.29,-1646.89) cw(c1109.06,-1646.89) 1109.06,-1642.13 1382.53,-1642.13 1390.75,-1650.35 1390.75,-1681.76 1410.14,-1701.15 1421.78,-1701.15 1426.27,-1705.64 v1(1428.95,-1705.64)
PG_1V0: U12.20 U12.21
PG_ALL: Q1.6 Q2.1 R78.2 | length 117.3
  L1 (SIG) w8: Q2.1@1227.07,-111.92 Q1.6@1344.36,-111.92
PROG_B: D1.1 R17.2 U7.P9 | length 74.5
  L1 (SIG) w10: v1(1515.1,-852.24) U7.P9@1530.85,-836.49
  L8 (SIG) w5: D1.1@1489.25,-868.63 1498.71,-868.63 1512.63,-854.71 v1@1512.63,-854.18 ; v1@1515.36,-851.49 1515.81,-851.04 1536.71,-851.04 R17.2@1537.4,-851.74
RD_N: R29.1 T1.6 U10.9 | length 483.4
  L1 (SIG) w4.11: U10.9@2191.81,-1180.15 2191.81,-1169.32 2186.52,-1164.03 2186.52,-1099.69 2211.63,-1074.58 2232.38,-1074.58 2298.53,-1008.43 2305.87,-1008.43 2309.91,-1012.46 2309.91,-1040.54 2326.29,-1056.92 2326.29,-1057.91 2332.49,-1051.7 2366.04,-1051.7 2378.48,-1039.26 2387.41,-1039.26 2395.15,-1031.52 2395.15,-1030.76 2403.61,-1022.3 2407.01,-1022.3 2409.41,-1024.71 2409.41,-1038.38 2428.94,-1057.91 T1.6@2474.02,-1057.91
RD_P: R28.2 T1.4 U10.10 | length 503.8
  L1 (SIG) w4.11: U10.10@2172.13,-1180.15 2172.13,-1169.32 2177.42,-1164.03 2177.42,-1095.91 2207.86,-1065.47 2228.61,-1065.47 2294.76,-999.32 2308.45,-999.32 2320.72,-987.05 2352.68,-987.05 R28.2@2361.45,-978.27 ; R28.2@2361.45,-977.29 R28.2@2361.45,-978.27 ; T1.4@2474.02,-977.59 2428.94,-977.59 2409.41,-997.12 2409.41,-1010.79 2407.01,-1013.2 2399.84,-1013.2 2386.04,-1026.99 2386.04,-1027.75 2383.64,-1030.15 2380.24,-1030.15 2377.83,-1027.75 2377.83,-994.65 R28.2@2361.45,-978.27
RX_MUX_SEL: U4.4 U4.12 | length 266.1
  L1 (SIG) w8: v1(747.95,-1250.16) 748.37,-1250.58 U4.12@768.41,-1250.58 ; v1@925.74,-1212.83 925.61,-1212.97 925.61,-1250.3 U4.4@925.89,-1250.58
  L3 (SIG) w8: v1(747.95,-1250.16) 897.85,-1250.16 906.02,-1241.99 906.02,-1229.74 906.16,-1229.6 906.16,-1217.09 910.84,-1212.41 v1(925.32,-1212.41)
SDI_CLK_N: C38.2 U7.P18 | length 529
  L1 (SIG) w4.11: U7.P18@1814.31,-836.49 1814.31,-835.68 1822.26,-827.72 1823.72,-827.72 1836.91,-814.54 1890.68,-814.54 1912.39,-836.25 1912.39,-1026.73 1891.89,-1047.22 1886.11,-1047.22 v1(1884.26,-1049.07)
  L8 (SIG) w4.11: C38.2@1804.64,-1036.32 1804.64,-1035.77 1797.39,-1028.52 1786.15,-1028.52 1783.75,-1026.12 1783.75,-1022.07 1792.96,-1012.86 1879.71,-1012.86 1900.89,-1034.04 1900.89,-1038.22 1891.89,-1047.22 1886.11,-1047.22 v1(1884.26,-1049.07)
SDI_CLK_P: C36.2 U7.N17 | length 623.2
  L1 (SIG) w4.11: U7.N17@1782.81,-805 1797.4,-819.59 1817.53,-819.59 1818.49,-818.62 1819.95,-818.62 1833.14,-805.44 1894.45,-805.44 1921.49,-832.47 1921.49,-1030.5 1898.33,-1053.66 1898.33,-1059.44 v1(1896.48,-1061.29)
  L8 (SIG) w4.11: C36.2@1754.51,-1037.09 1754.51,-1035.77 1761.76,-1028.52 1772.24,-1028.52 1774.64,-1026.12 1774.64,-1018.3 1789.19,-1003.75 1883.48,-1003.75 1910,-1030.27 1910,-1042 1898.33,-1053.66 1898.33,-1059.44 v1(1896.48,-1061.29)
SDI_IN_N: C139.2 U2.3 | length 70.8
  L1 (SIG) w4.11: C139.2@353.74,-1356.5 cw(c356.58,-1356.5) 356.58,-1353.66 U2.3@422.95,-1353.66
SDI_IN_P: C129.2 U2.2 | length 69.8
  L1 (SIG) w4.11: C129.2@353.72,-1328.63 353.72,-1328.07 U2.2@422.95,-1328.07
SDI_OUT_N: C77.2 R65.1 U3.17 | length 114.3
  L1 (SIG) w5: C77.2@631.47,-1899.24 cw(c632.46,-1900.22) 632.46,-1898.83 R65.1@657.33,-1898.83 674.74,-1898.83 ccw(c674.74,-1891.92) 679.63,-1896.8 cw(c692.46,-1909.63) 692.46,-1891.49 U3.17@743.74,-1891.49
SDI_OUT_P: L2.1 R64.1 R66.1 U3.16 | length 154.6
  L1 (SIG) w5: L2.1@620.75,-1831.95 620.75,-1860.12 R66.1@622.92,-1862.28 681.13,-1862.28 cw(c681.13,-1878.32) 692.47,-1866.98 ccw(c704.12,-1855.33) 704.12,-1871.8 U3.16@743.74,-1871.8
SER_CS: U1.6 U3.34 | length 1117.5
  L1 (SIG) w5: U3.34@946.5,-2054.88 946.5,-2080.05 961.72,-2095.27 1084.63,-2095.27 1092.24,-2087.66 1092.24,-1886.9 1134.24,-1844.89 1134.24,-1562.58 1165.03,-1531.79 1165.03,-1338.34 1201.44,-1301.93 U1.6@1307.57,-1301.93
SER_DVB_ASI: R63.1 SB3.2 U3.6 | length 102.6
  L1 (SIG) w6: SB3.2@837.08,-1732.92 837.58,-1732.92 840.28,-1735.62 R63.1@886.68,-1735.62 887.45,-1736.39 U3.6@887.45,-1787.16
SER_LOCK: U1.7 U3.31 | length 1269.8
  L1 (SIG) w5: U3.31@887.45,-2054.88 887.45,-2126.66 926.4,-2165.62 1072.37,-2165.62 1101.74,-2136.26 1101.74,-1890.83 1143.74,-1848.83 1143.74,-1570.83 1176.7,-1537.88 1176.7,-1357.75 1212.83,-1321.61 U1.7@1307.57,-1321.61
SER_R\E\S\E\T\: U1.8 U3.30 | length 1297.7
  L1 (SIG) w5: U3.30@867.76,-2054.88 867.76,-2139.85 902.36,-2174.45 1092.32,-2174.45 1111.94,-2154.83 1111.94,-1895.06 1153.95,-1853.05 1153.95,-1579.53 1190.43,-1543.05 1190.43,-1370.41 1219.54,-1341.3 U1.8@1307.57,-1341.3
SFP_DIS_TRANS: M1.3 Q4.3 R85.1 SB4.1 | length 225.9
  L1 (SIG) w8: M1.3@1946.04,-1854.54 1946.27,-1854.3 2010.13,-1854.3 v1@2010.78,-1853.65
  L8 (SIG) w8: R85.1@1977.62,-1853.99 1999.49,-1853.99 2000.04,-1853.45 2002.99,-1853.45 SB4.1@2009.86,-1853.45 ; Q4.3@1983.35,-1956.75 1984.59,-1955.5 2004.49,-1955.5 2013.19,-1946.8 2013.19,-1866.87 2009.18,-1862.85 v1(2009.18,-1854.07)
SFP_LOS: M1.8 R83.2 U7.P17 | length 1309.5
  L1 (SIG) w5: U7.P17@1782.81,-836.49 1798.28,-851.96 1896.54,-851.96 1900.95,-856.37 1900.95,-969.21 1892.12,-978.04 1834.11,-978.04 1825.71,-986.44 1825.71,-1137.6 1749.82,-1213.5 1749.82,-1390.29 1770.11,-1410.58 1855.55,-1410.58 1867.48,-1422.52 1867.48,-1685.02 1879.44,-1696.97 M1.8@1946.12,-1696.97
  L1 (SIG) w8: M1.8@1946.12,-1696.97 2001.89,-1696.97 v1@2002.05,-1696.82
  L8 (SIG) w8: R83.2@1980.69,-1696.96 v1@2000.26,-1696.96
  other v1: 2000.66,-1696.89
SFP_MOD: M1.6 R82.2 U7.V17 | length 1115.7
  L1 (SIG) w5: 1768.18,-1105.58 1716.6,-1157.15 1716.6,-1418.74 1732.43,-1434.56 1836.35,-1434.56 1845.66,-1443.88 1845.66,-1736.66 1869.05,-1760.05 M1.6@1946.04,-1760.05 1946.65,-1759.44 2005.36,-1759.44 v1@2006.21,-1758.6 ; 1768.23,-1105.63 1782.81,-1091.05 U7.V17@1782.81,-962.48
  L8 (SIG) w8: R82.2@1976.18,-1759.44 1976.48,-1759.14 2004.68,-1759.14 v1@2004.84,-1759.31
  other v1: 2005.47,-1758.84
SFP_RS0: M1.7 R87.2 SB6.1 U7.U17 | length 1117.4
  L1 (SIG) w5: U7.U17@1782.81,-930.98 1798.47,-946.63 1798.47,-1107.21 1733.21,-1172.47 1733.21,-1400.32 1755.47,-1422.57 1843.64,-1422.57 1855.16,-1434.09 1855.16,-1717.9 1865.81,-1728.55 M1.7@1946.04,-1728.55 ; M1.7@1946.04,-1728.55 v1(2008.77,-1728.53)
  L8 (SIG) w5: R87.2@1974.3,-1728.74 v1@2011.11,-1728.74
SFP_RS1: M1.9 R86.2 SB5.1 U7.M18 | length 1383.5
  L1 (SIG) w5: U7.M18@1815.84,-774.11 1816.45,-773.5 1886.27,-773.5 1899.56,-760.21 1953.87,-760.21 1963.89,-770.23 1963.89,-858.15 1937.06,-884.98 1937.06,-1069.33 1766.42,-1239.97 1766.42,-1344.92 1766.11,-1345.23 1766.11,-1377.77 1786.93,-1398.59 1869.61,-1398.59 1880.83,-1409.81 1880.83,-1656.24 1890.15,-1665.56 M1.9@1946.04,-1665.56 1946.85,-1664.75 v1(2009.37,-1664.75)
  L8 (SIG) w8: R86.2@1980.78,-1665.43 2008.7,-1665.43 v1(2009.37,-1664.75)
SFP_SCL: M1.5 U7.U16 | length 1113.7
  L1 (SIG) w5: U7.U16@1752.06,-931.73 1768.35,-948.02 1768.35,-1075.22 1700,-1143.57 1700,-1430.64 1715.91,-1446.55 1826.55,-1446.55 1836.16,-1456.17 1836.16,-1770.53 1857.17,-1791.54 M1.5@1946.04,-1791.54
SFP_SCL.SDA: M1.4 U7.V16 | length 1130.9
  L1 (SIG) w5: U7.V16@1750.27,-961.03 1751.32,-962.08 1751.32,-1040.84 1683.39,-1108.77 1683.39,-1444.23 1697.71,-1458.54 1819.4,-1458.54 1825.47,-1464.62 1825.47,-1805.31 1843.2,-1823.04 M1.4@1946.04,-1823.04
SFP_SCL.TX_DIS: R103.1 U7.T11 | length 1220.6
  L1 (SIG) w5: U7.T11@1593.84,-899.48 1608.18,-913.83 v1(1609.08,-913.83)
  L8 (SIG) w5: v1(1609.08,-913.83) 1639.37,-944.12 1639.37,-1059.14 1683.19,-1102.95 1683.19,-1379.92 1747.04,-1443.77 1814.75,-1443.77 1826.77,-1455.79 1826.77,-1560.8 ; 1828.69,-1560.8 1828.69,-1591.23 1857.15,-1619.69 1857.15,-1971.67
SFP_SCL.TX_FAULT: M1.2 R84.2 U7.T16 | length 1422.9
  L1 (SIG) w4.7: U7.T16@1751.32,-899.48 1752.29,-899.48 1767.27,-914.47 v1(1768.25,-914.47)
  L1 (SIG) w8: M1.2@1946.04,-1886.03 1946.69,-1885.38 1993.87,-1885.38 1994.92,-1884.33 v1@1994.92,-1884.21
  L8 (SIG) w4.7: v1(1768.25,-914.47) 1752.03,-930.68 1752.03,-958.83 1747.2,-963.66 1668.58,-963.66 1652.46,-979.78 1652.46,-1051.96 1696.57,-1096.07 1696.57,-1375.19 1745.83,-1424.45 1842.06,-1424.45 1853.29,-1435.68 1853.29,-1586.14 1873.24,-1606.09 1873.24,-1875
  L8 (SIG) w5: 1873.15,-1875 1873.15,-1891.87 1881.81,-1900.54 1964.25,-1900.54 1967.18,-1897.61 1967.18,-1891.79 1973.54,-1885.43 R84.2@1974.3,-1885.43
  L8 (SIG) w8: R84.2@1979.26,-1884.71 v1@1995.69,-1884.71
  other v1: 1996.54,-1884.72
SFP_TX_N: M1.19 R38.1 U7.P14 | length 1433.4
  L1 (SIG) w4.11: v1(1486.28,-1866.69) 1486.28,-1869.3 1490.37,-1873.39 1490.37,-1882.9 1498.11,-1890.64 1566.38,-1890.64 1566.43,-1890.58 1575.88,-1890.58 1578.28,-1892.99 1578.28,-1898.28 1581.78,-1901.78 M1.19@1623.21,-1901.78 ; U7.P14@1688.33,-836.49 1702.2,-850.36 v1(1702.2,-850.47)
  L6 (SIG) w3.3: v1(1486.28,-1866.69) 1486.28,-1864 1490.77,-1859.51 1490.77,-1842.71 1467.57,-1819.51 1467.57,-1679.76 1478.36,-1668.97 1478.36,-1453.53 1497.81,-1434.08 1497.81,-1017.22 1543.4,-971.62 1700.17,-971.62 1715.23,-956.56 1715.23,-919.47 1716.03,-918.67 1716.03,-843.1 1712.29,-839.37 1709.56,-839.37 1707.63,-841.3 1707.63,-842.2 1702.2,-847.63 v1(1702.2,-850.47)
SFP_TX_P: M1.18 R38.2 U7.N14 | length 1433.1
  L1 (SIG) w4.11: v1(1503.56,-1866.69) 1503.56,-1869.3 1499.47,-1873.39 1499.47,-1879.13 1501.88,-1881.53 1562.61,-1881.53 1562.66,-1881.48 1575.88,-1881.48 1578.28,-1879.07 1578.28,-1873.78 1581.78,-1870.28 M1.18@1623.21,-1870.28 ; U7.N14@1688.33,-805 1703.29,-819.96 v1(1703.4,-819.96)
  L6 (SIG) w3.3: v1(1503.56,-1866.69) 1503.56,-1864 1499.07,-1859.51 1499.07,-1839.27 1475.87,-1816.07 1475.87,-1683.2 1486.66,-1672.41 1486.66,-1456.97 1506.11,-1437.52 1506.11,-1020.65 1546.84,-979.92 1703.61,-979.92 1723.53,-960 1723.53,-922.9 1724.32,-922.11 1724.32,-839.66 1715.73,-831.07 1709.56,-831.07 1707.63,-829.13 1707.63,-827.03 1703.4,-822.8 v1(1703.4,-819.96)
SPI_CS: R15.2 U6.C2 U7.L13 | length 469.5
  L1 (SIG) w6.41: U7.L13@1656.83,-742 v1(1672.58,-757.75) ; v1(2053.22,-737.96) 2053.61,-737.96 2071.42,-720.15 U6.C2@2071.81,-720.15
  L6 (SIG) w4.7: v1(1672.58,-757.75) 1687.82,-772.99 1862.37,-772.99 1876.74,-758.62 1964.38,-758.62 2030.91,-758.62 2040.57,-758.62 2051.49,-747.71 2051.49,-739.7 v1(2053.22,-737.96)
  L8 (SIG) w6.41: v1@2054.98,-736.84 2055.75,-737.62 2069.23,-737.62 R15.2@2069.58,-737.27
SPI_DQ0: U6.D3 U7.K17 | length 412.5
  L1 (SIG) w6.41: U7.K17@1782.81,-710.51 v1(1798.56,-726.26) ; v1(2093,-697.1) 2093,-741.33 U6.D3@2111.18,-759.52
  L6 (SIG) w4.7: v1(1798.56,-726.26) 1813.7,-711.11 1851.29,-711.11 1881.98,-680.42 1939.63,-680.42 1996.85,-680.42 2076.32,-680.42 v1(2093,-697.1)
SPI_DQ1: U6.D2 U7.K18 | length 602.7
  L1 (SIG) w6.41: v1(1798.68,-693.91) 1798.68,-694.4 1814.31,-710.02 U7.K18@1814.31,-710.51 ; U6.D2@2071.81,-759.52 2092.44,-780.15 2125.39,-780.15 2132.22,-773.32 2132.22,-748.99 2136.75,-744.46 2136.96,-744.46 2143.14,-738.28 v1(2173.13,-738.28)
  L6 (SIG) w4.7: v1(1798.68,-693.91) 1824.32,-668.27 1824.32,-665.24 1848.22,-641.34 2073.97,-641.34 2170.91,-738.28 v1(2173.13,-738.28)